# Altium PCB Rear Motors.PcbDoc
Units mm, origin at the board's own origin, x right, y up, seen from the top; angles counter-clockwise.
Board outline 82.5 x 85.5 mm, 2 copper layers (Top Layer, Bottom Layer); 45 components, 116 nets, 140 pads, 0 vias.
Unrouted connection lines stored in the file: 16.
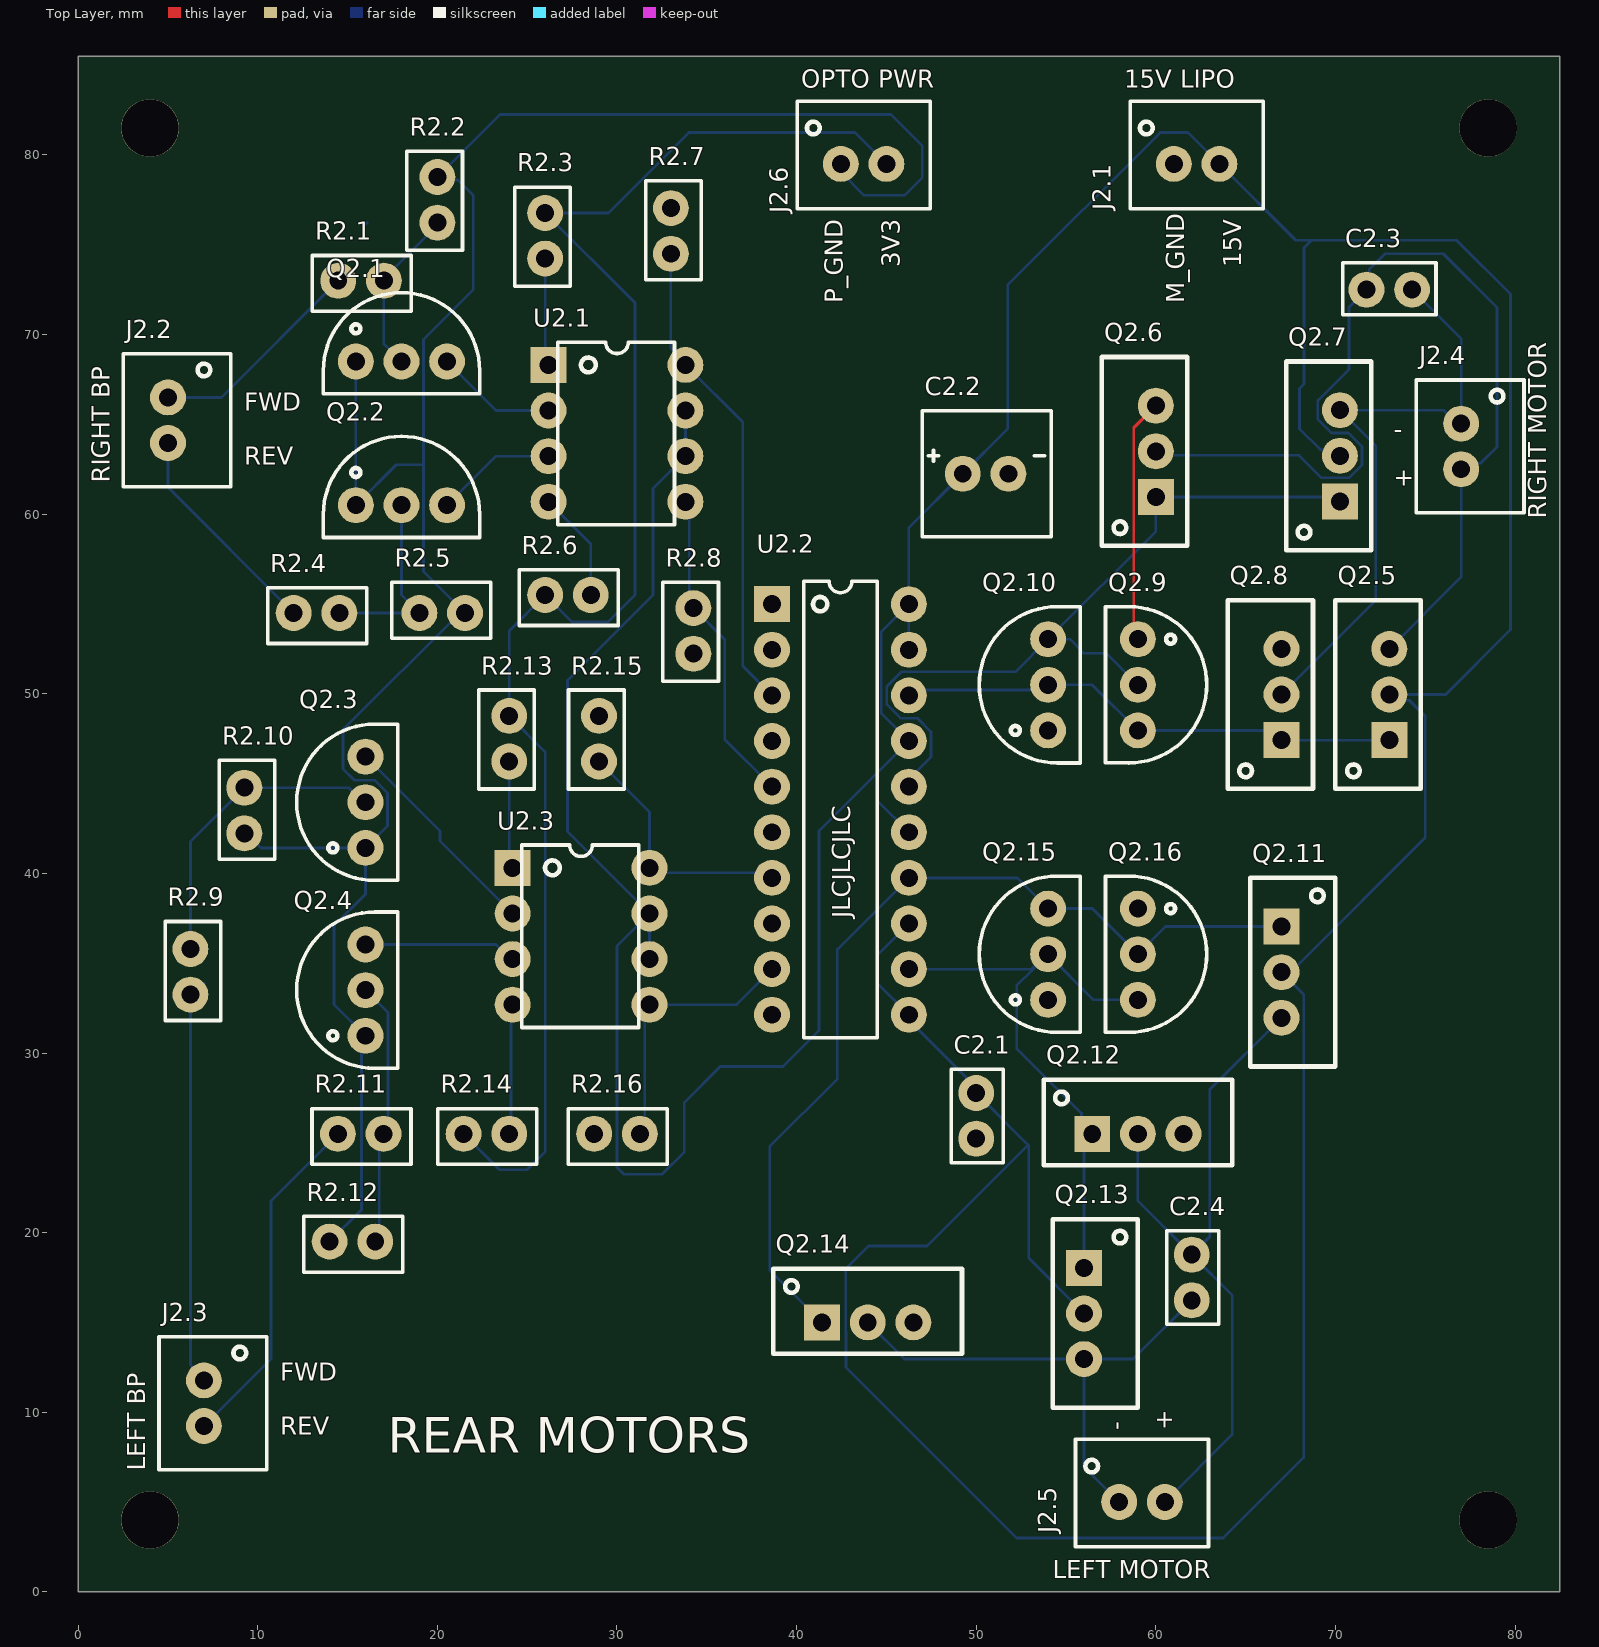
[diagram p0: Top Layer view]
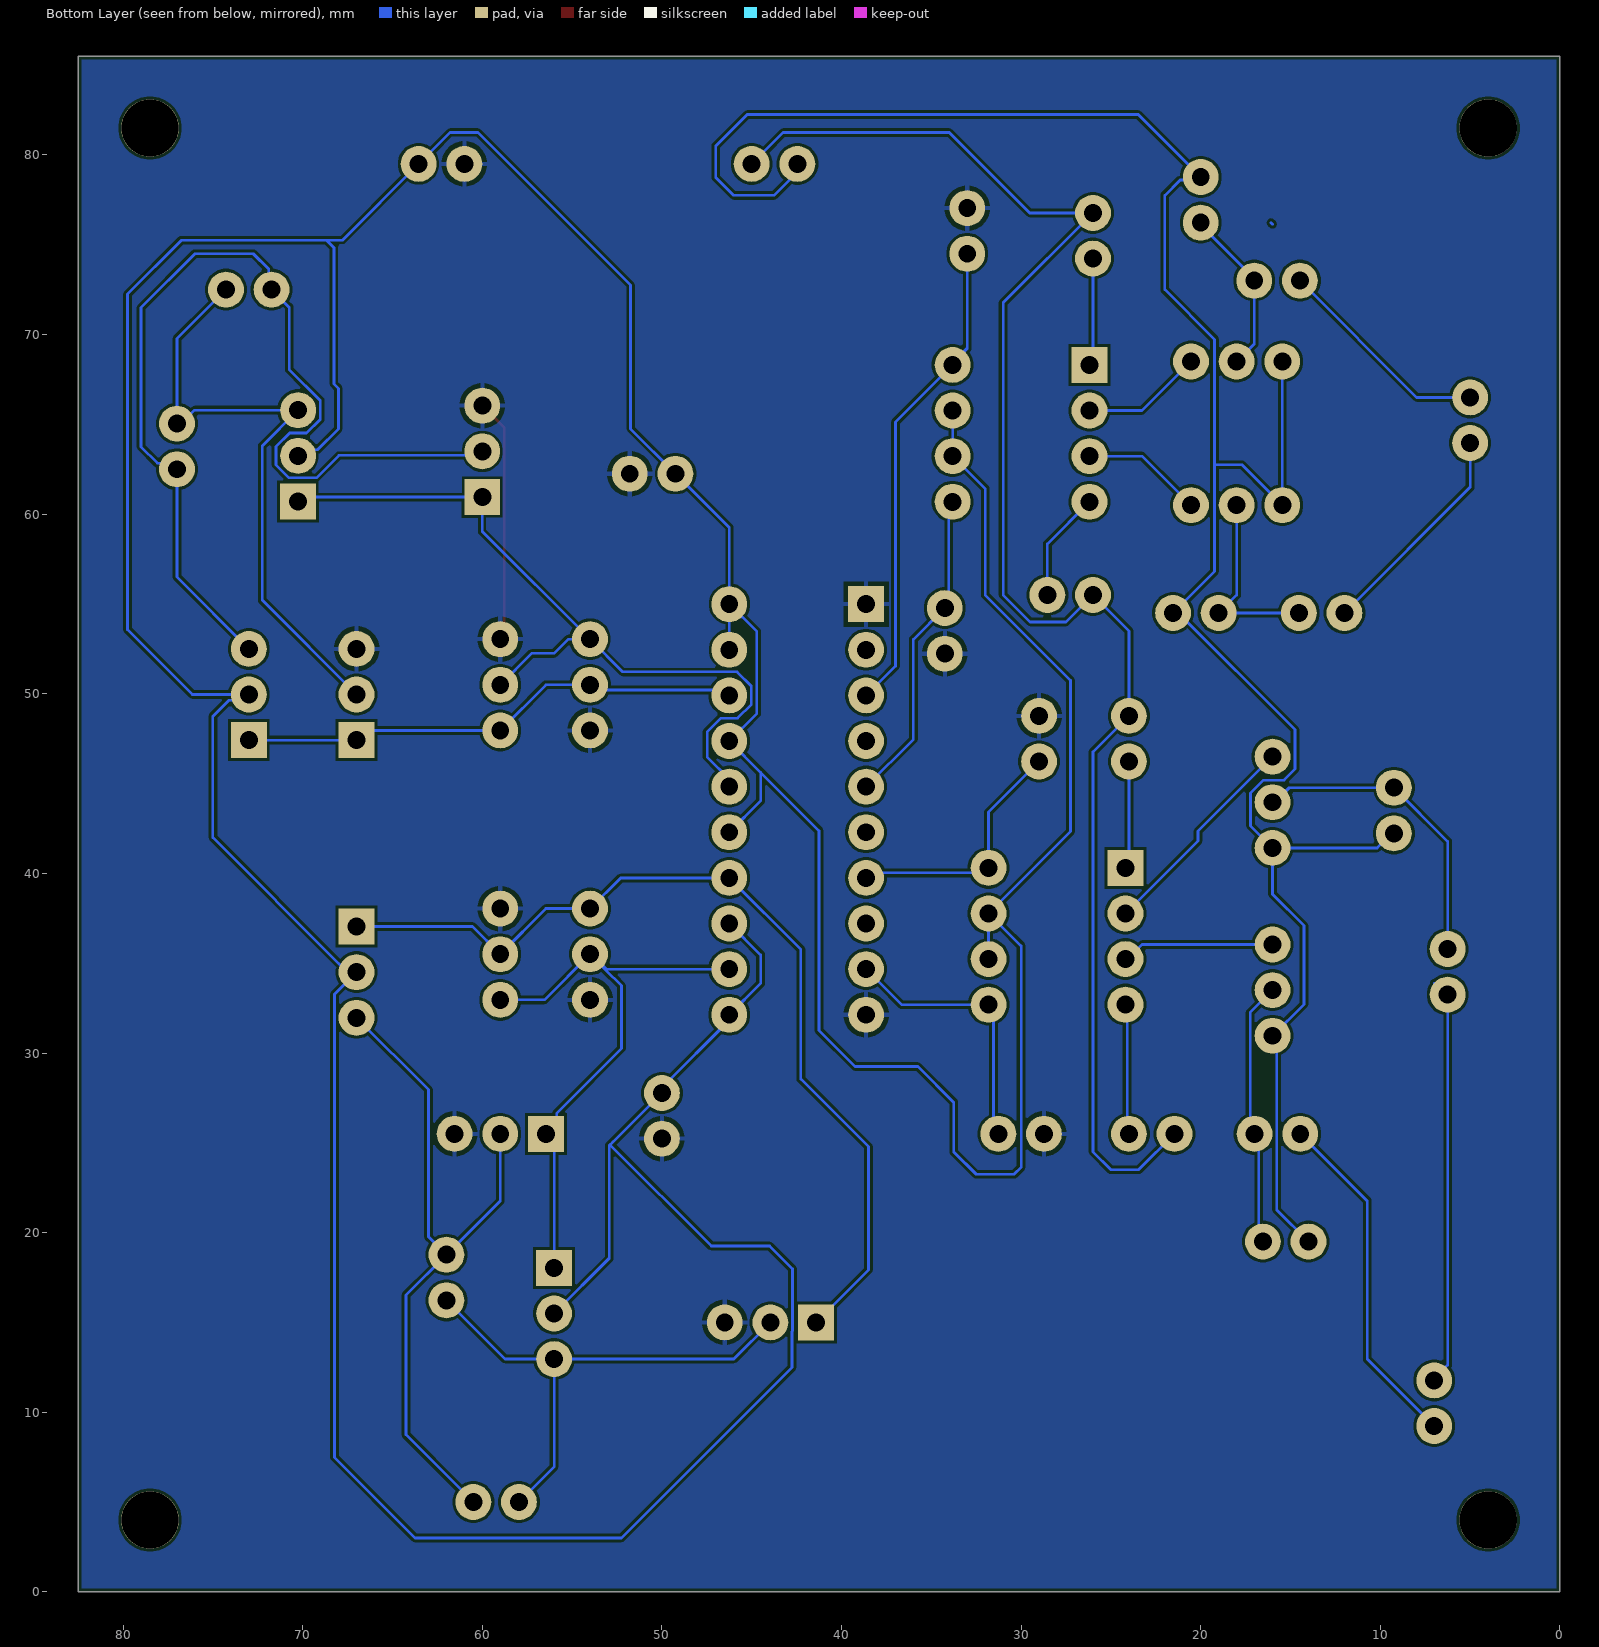
[diagram p1: Bottom Layer view, seen from below]
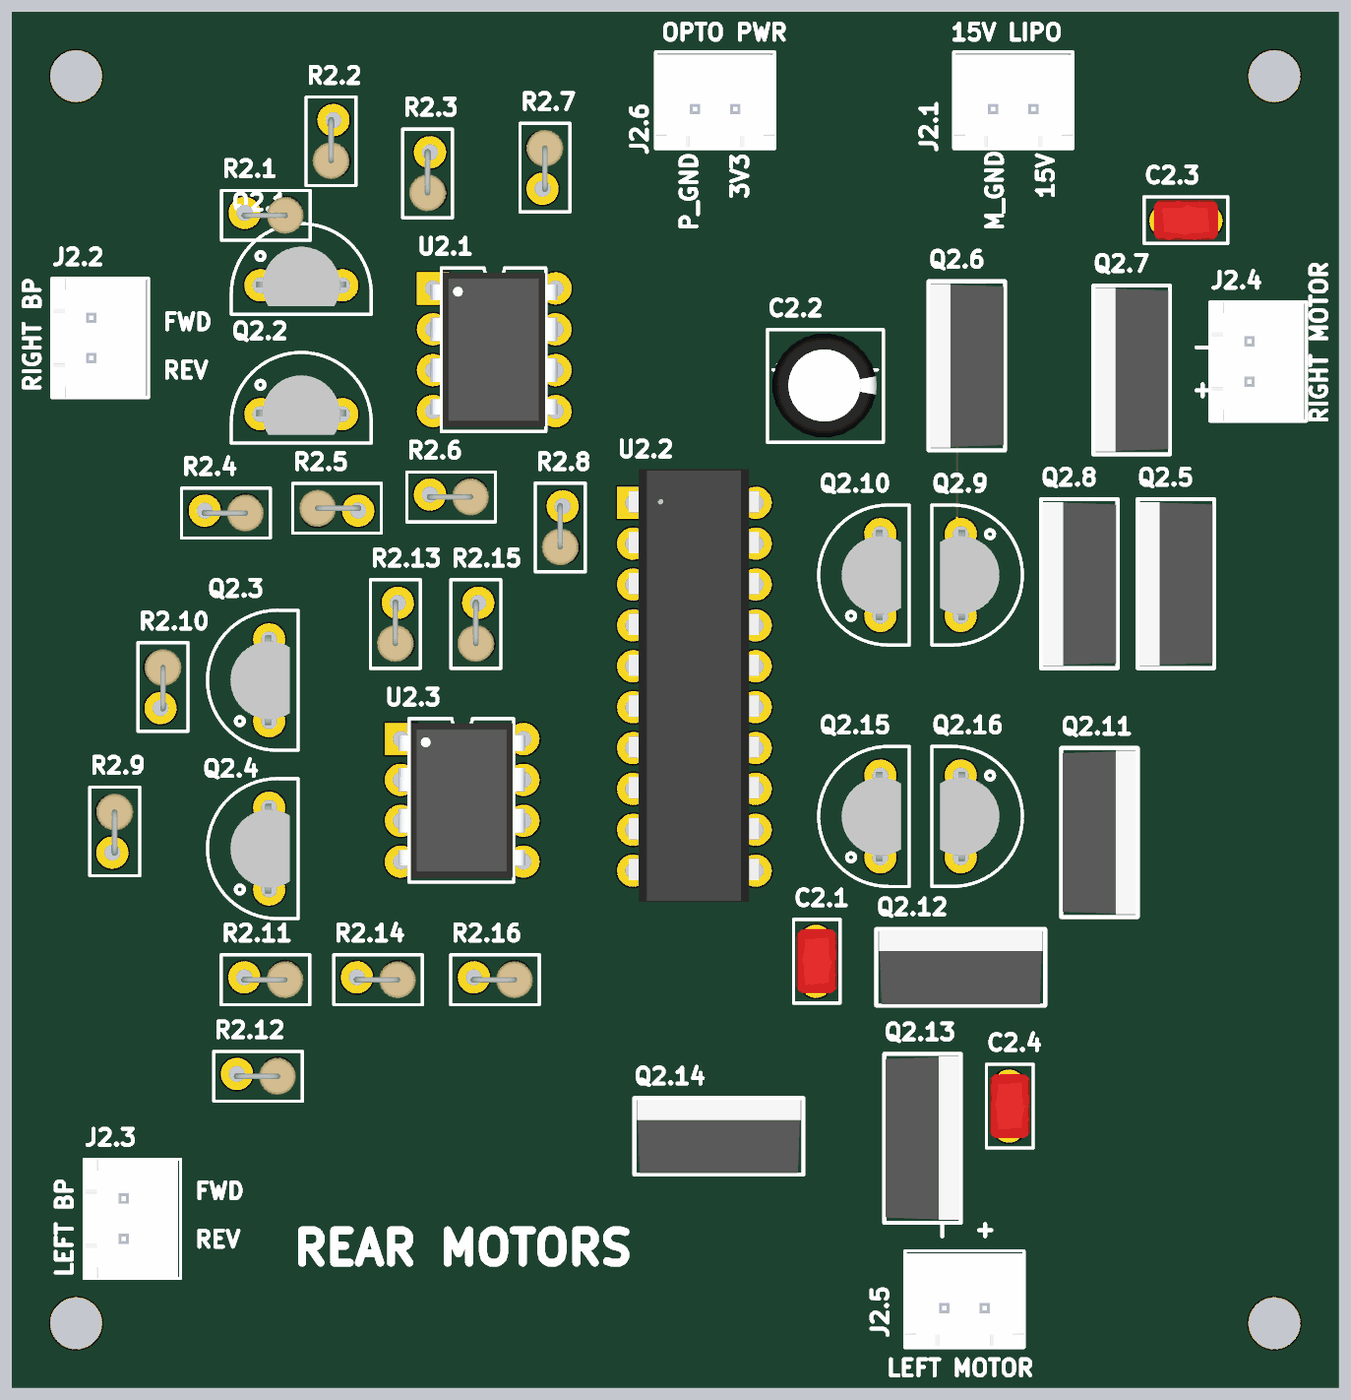
[diagram p2: 3D render of the assembled board from above, using the file's embedded part models]

## Layer stack, top to bottom
Top Solder: solder mask 0.0102, Solder Resist, Dk 3.5
Top Layer: signal copper 0.0356
Dielectric 1: dielectric 0.32, FR-4, Dk 4.8
Bottom Layer: signal copper 0.0356
Bottom Solder: solder mask 0.0102, Solder Resist, Dk 3.5

## Board outline
0,0 0,85.5 82.5,85.5 82.5,0

## Design rules (kind name [scope] priority, off if disabled: settings)
BoardOutlineClearance [All] p1: gap=0.2 ignorepadtopadclearanceinfootprint=FALSE
Clearance [All] p1: gap=0.152 ignorepadtopadclearanceinfootprint=FALSE
HoleSize [All] p1: absolutevalues=TRUE maxlimit=100 minlimit=0.4 maxpercent=80.000 minpercent=20.000
PolygonConnect [All] p1: connectstyle=Relief reliefconductorwidth=0.254 reliefentries=4 polygonreliefangle="90 Angle" airgapwidth=0.254
RoutingVias [All] p1: holewidth=0.4 width=0.8 viastyle="Through Hole" minholewidth=0.4 minwidth=0.6 maxholewidth=100 maxwidth=100
SilkToSilkClearance [All] p1: silktosilkclearance=0
SilkToSolderMaskClearance [IsPad] p1: minsilkscreentomaskgap=0 clearancetoexposedcopper=TRUE
SolderMaskExpansion [All] p1: expansion=0.102 istentingtop=FALSE
Width [All] p1: maxlimit=100 minlimit=0.152 preferedwidth=0.152
27 further rules are at their usual default settings.

## Components (designator, comment, footprint, x,y, rotation, side; value= is the part's Value field where it differs from the comment)
C2.1 "100p" "Non Polarized Cap" 50,26.5 r270 top
C2.2 "100u" "Polarized Cap" 50.52,62.25 r0 top
C2.3 "100n" "Non Polarized Cap" 73,72.5 r0 top
C2.4 "100n" "Non Polarized Cap" 62,17.5 r270 top
J2.1 "15V Lipo" "2pos JST" 62.27,79.5 r0 top
J2.2 "Right Motor BP" "2pos JST" 5,65.23 r270 top
J2.3 "Left Motor BP" "2pos JST" 7,10.5 r270 top
J2.4 "Left Motor Out" "2pos JST" 77,63.77 r270 top
J2.5 "Left Motor Out" "2pos JST" 59.23,5 r0 top
J2.6 "Optocoupler Power, Gnd" "2pos JST" 43.73,79.5 r0 top
Q2.1 "VN2222LL" VN2222LL 18,68.5 r0 top
Q2.2 "VN2222LL" VN2222LL 18,60.5 r0 top
Q2.3 "VN2222LL" VN2222LL 16,43.96 r90 top
Q2.4 "VN2222LL" VN2222LL 16,33.5 r90 top
Q2.5 "IRFZ44" TO220 73,49.96 r90 top
Q2.6 "IRFZ44" TO220 60,63.5 r90 top
Q2.7 "IRFZ44" TO220 70.25,63.25 r90 top
Q2.8 "IRFZ44" TO220 67,49.96 r90 top
Q2.9 "VN2222LL" VN2222LL 59,50.5 r270 top
Q2.10 "VN2222LL" VN2222LL 54,50.5 r90 top
Q2.11 "IRFZ44" TO220 67,34.5 r270 top
Q2.12 "IRFZ44" TO220 59,25.5 r0 top
Q2.13 "IRFZ44" TO220 56,15.5 r270 top
Q2.14 "IRFZ44" TO220 43.96,15 r0 top
Q2.15 "VN2222LL" VN2222LL 54,35.5 r90 top
Q2.16 "VN2222LL" VN2222LL 59,35.5 r270 top
R2.1 "1k" Res_Generic 15.75,73 r0 top
R2.2 "10k" Res_Generic 20,77.5 r270 top
R2.3 "330" Res_Generic 26,75.5 r270 top
R2.4 "1k" Res_Generic 13.27,54.5 r0 top
R2.5 "10k" Res_Generic 20.27,54.5 r180 top
R2.6 "330" Res_Generic 27.27,55.5 r0 top
R2.7 "1k" Res_Generic 33,75.77 r90 top
R2.8 "1k" Res_Generic 34.25,53.5 r270 top
R2.9 "1k" Res_Generic 6.25,34.52 r90 top
R2.10 "10k" Res_Generic 9.25,43.5 r90 top
R2.11 "1k" Res_Generic 15.73,25.5 r0 top
R2.12 "10k" Res_Generic 15.27,19.5 r0 top
R2.13 "330" Res_Generic 24,47.5 r270 top
R2.14 "330" Res_Generic 22.73,25.5 r0 top
R2.15 "1k" Res_Generic 29,47.5 r270 top
R2.16 "1k" Res_Generic 30,25.5 r0 top
U2.1 "MCT6" DIP8 30,64.5 r0 top
U2.2 "LT1161IN" DIP20 42.44,43.56 r0 top
U2.3 "MCT6" DIP8 28,36.5 r0 top

## Footprints (in the part's own frame and the unit in brackets; to place one, negate y for a bottom-side part, rotate by r counter-clockwise, add the part's x,y. Pads: shape width x height; smd on the part's side, far side on the other; paste and mask are expansions set on the pad)
"2pos JST" [mm]
  round 2 hole 1: 1(-1.27,0) 2(1.27,0)
  silkscreen extent -3.7,-2.5 3.7,3.5, body extent -3.7,-2.4 3.7,3.35, height 7.01
DIP8 [mm]
  rect 2x2 hole 1: 1(-3.81,3.81)
  round 2 hole 1: 2(-3.81,1.27) 3(-3.81,-1.27) 4(-3.81,-3.81) 5(3.81,-3.81) 6(3.81,-1.27) 7(3.81,1.27) 8(3.81,3.81)
  silkscreen extent -3.3,-5.08 3.2,5.08, body extent -3.96,-4.79 3.91,4.79, height 5.33
DIP20 [mm]
  rect 2x2 hole 1: 1(-3.81,11.43)
  round 2 hole 1: 2(-3.81,8.89) 3(-3.81,6.35) 4(-3.81,3.81) 5(-3.81,1.27) 6(-3.81,-1.27) 7(-3.81,-3.81) 8(-3.81,-6.35) 9(-3.81,-8.89) 10(-3.81,-11.43) 11(3.81,-11.43) 12(3.81,-8.89) 13(3.81,-6.35) 14(3.81,-3.81) 15(3.81,-1.27) 16(3.81,1.27) 17(3.81,3.81) 18(3.81,6.35) 19(3.81,8.89) 20(3.81,11.43)
  silkscreen extent -2.04,-12.7 2.04,12.7, body extent -4.09,-13.39 4.04,13.53, height 3.81
"Non Polarized Cap" [mm] "Cap Generic THT"
  round 2 hole 1: 1(-1.27,0) 2(1.27,0)
  silkscreen extent -2.6,-1.4 2.6,1.5, body extent -2,-1.2 2,1.3, height 6
"Polarized Cap" [mm]
  round 2 hole 1: 1(-1.27,0) 2(1.27,0)
  silkscreen extent -3.53,-3.5 3.66,3.5, body extent -3.25,-3.22 3.25,3.28, height 11.37
Res_Generic [mm] "Cap Generic THT Footprint"
  round 2 hole 1: 1(-1.27,0) 2(1.27,0)
  silkscreen extent -2.71,-1.7 2.8,1.4, body extent -1.47,-1.3 2.4,1, height 8.18
TO220 [mm]
  rect 2x2 hole 1: 1(-2.54,0)
  round 2 hole 1: 2(0,0) 3(2.54,0)
  silkscreen extent -5.25,-1.75 5.25,3, body extent -5.08,-1.66 5.08,2.91, height 19.6
VN2222LL [mm]
  round 2 hole 1: 1(-2.54,0) 2(0,0) 3(2.54,0)
  silkscreen extent -4.35,-1.8 4.35,3.83, body extent -2.78,-1.28 2.78,2.4, height 7.82

## Part data
C2.1 C2.3 C2.4: library part Cap_Generic
C2.2: library part "Polarized Cap"
J2.1 J2.2 J2.3 J2.4 J2.5 J2.6: library part "2pos Conn", "2pos Conn JST"
Q2.1 Q2.2 Q2.3 Q2.4 Q2.9 Q2.10 Q2.15 Q2.16: library part "VN2222LL NMOS", "VN2222LL N-Channel 60 V 150mA 400mW Through Hole TO-92 (TO-226)", Supplier Part Number 1=689-VN2222LL-G, Supplier 1=Mouser
Q2.5 Q2.6 Q2.7 Q2.8 Q2.11 Q2.12 Q2.13 Q2.14: library part "IRFZ44 NMOS", "IRFZ44EPBF N-Channel 60 V 48A 110W Through Hole TO-220AB", Supplier Part Number 1=IRFZ44ZLPBF-ND, Supplier 1=Digi-Key
R2.1 R2.2 R2.3 R2.4 R2.5 R2.6 R2.7 R2.8 R2.9 R2.10 R2.11 R2.12 R2.13 R2.14 R2.15 R2.16: library part Res_Generic
U2.1 U2.3: library part "MCT6 Optocoupler", "Optoisolator 5.3KV 2CH TRANS 8-DIP", Supplier Part Number 1=512-MCT6, Supplier 1=Mouser
U2.2: library part "LT1161IN Gate Driver", "LT1161IN High-Side Gate Driver IC Non-Inverting 20-PDIP", Supplier Part Number 1=LT1161IN#PBF-ND, Supplier 1=Digi-Key

## Free pads (board coordinates)
  round 3.2 hole 3.2: ""(4,4) ""(4,81.5) ""(78.5,4) ""(78.5,81.5)

## Nets (pads, with @x,y where several pads share a name; then routed paths per layer and width w, separated by ;. In a path a pad name is that pad's centre, name@x,y a point inside that pad or via, vN(x,y) a via of type N, cw(c..) or ccw(c..) an arc to the next point about the centre after c; other vN are vias at no path point)
3.3V_P: J2.6.2 R2.3.1 R2.6.1 R2.13.1 R2.14.1 | length 89.6
  Bottom Layer w0.152: R2.14.1 23.46,23.5 25,23.5 26,24.5 26,46.77 R2.13.1 24,53.5 R2.6.1 27.5,54 29.5,54 31,55.5 31,71.77 R2.3.1 29.52,76.77 34,81.25 43.25,81.25 J2.6.2
5V_ARM: 
5V_P: 
5V_SERVO: 
8V: 
15V: C2.1.1 C2.2.1 J2.1.2 Q2.5.2 Q2.7.2 Q2.11.2 Q2.13.2 U2.1.6 U2.1.7 U2.2.11 U2.2.13 U2.2.15 U2.2.17 U2.2.19 U2.2.20 U2.3.6 U2.3.7 | length 320.1
  Bottom Layer w0.152: U2.3.6 U2.3.7 ; U2.1.7 U2.1.6 32,61.42 32,55.5 27.25,50.75 27.25,42.33 U2.3.7 ; U2.2.13 44.5,35.46 44.5,33.88 U2.2.11 46.25,31.825 50,28.075 C2.1.1 52.717,25.053 52.929,24.841 52.929,18.571 Q2.13.2 ; U2.2.15 44.5,44.04 44.5,45.62 ; U2.2.19 U2.2.20 ; 52.885,24.885 47.25,19.25 44,19.25 42.731,17.981 42.731,14.519 42.75,14.5 42.75,12.5 52.25,3 63.75,3 68.229,7.479 68.229,33.271 Q2.11.2 67.5,34.5 67.966,34.966 75,42 75,48.75 74.111,49.639 73.853,49.639 73.79,49.702 Q2.5.2@73.79,49.96 ; Q2.7.2 69.909,63.591 69.159,63.591 68,64.75 68,67 68.25,67.25 68.25,74.835 68.665,75.25 ; Q2.5.2 Q2.5.2@73.79,49.96 ; U2.3.7 30,35.96 30,23.636 30.386,23.25 32.5,23.25 33.75,24.5 33.75,27.25 35.75,29.25 39.25,29.25 41.25,31.25 41.25,42.37 44.5,45.62 ; 44.5,45.62 U2.2.17 44.717,48.903 44.717,53.457 U2.2.20 ; U2.2.20 46.25,59.25 C2.2.1 51.75,64.75 51.75,72.75 60.25,81.25 61.79,81.25 J2.1.2 67.79,75.25 68.665,75.25 ; 68.665,75.25 76.75,75.25 79.75,72.25 79.75,53.569 76.141,49.96 Q2.5.2@73.79,49.96
ARM_SERV_BP_OUT: 
ARM_SERV_PWM: 
BOX_SERV_BP_OUT: 
BOX_SERV_PWM: 
BRIDGE_SERV_BP_OUT: 
BRIDGE_SERV_PWM: 
CLAW_SERV_BP_OUT: 
CLAW_SERV_PWM: 
DCLK: 
DIO: 
ECHO_F_M: 
ECHO_S_L: 
ECHO_S_R: 
ECHO_SPARE: 
ENCODER_L_I: 
ENCODER_L_Q: 
ENCODER_R_I: 
ENCODER_R_Q: 
IR_LEFT_TRANS: 
IR_RIGHT_TRANS: 
IR_SNS_LEFT: 
IR_SNS_RIGHT: 
LEFT+: C2.4.1 J2.5.2 Q2.11.3 Q2.12.2 | length 39.8
  Bottom Layer w0.152: Q2.12.2 59,21.77 C2.4.1 ; J2.5.2@60.268,4.768 J2.5.2 64.25,8.75 64.25,16.52 C2.4.1 ; Q2.11.3 63,27.96 63,19.77 C2.4.1
LEFT-: C2.4.2 J2.5.1 Q2.13.3 Q2.14.2 | length 29.7
  Bottom Layer w0.152: Q2.14.2 46,12.96 Q2.13.3 ; J2.5.1@57.759,4.529 J2.5.1@58.23,5 ; J2.5.1 56,6.96 Q2.13.3 ; C2.4.2 58.73,12.96 Q2.13.3
LEFT_FWD: Q2.11.1 Q2.14.1 Q2.15.3 Q2.16.2 U2.2.14 | length 52.3
  Bottom Layer w0.152: Q2.14.1 38.5,17.92 38.5,24.79 42.265,28.555 42.265,35.765 U2.2.14 52.29,39.75 Q2.15.3 56.46,38.04 Q2.16.2 60.54,37.04 Q2.11.1
LEFT_FWD_BP_OUT: J2.3.1 R2.9.1 | length 22.4
  Bottom Layer w0.152: R2.9.1 6.25,12.631 7,11.881 J2.3.1 ; R2.9.1@7,33.25 R2.9.1@7,33.877
LEFT_REV: Q2.12.1 Q2.13.1 Q2.15.2 Q2.16.3 U2.2.12 | length 34.3
  Bottom Layer w0.152: U2.2.12 53.093,34.67 53.923,35.5 Q2.15.2 ; Q2.13.1 56,25.04 Q2.12.1 55.861,26.099 55.861,26.639 52.25,30.25 52.25,33.75 53.131,34.631 53.961,35.461 Q2.15.2 ; Q2.16.3 56.54,32.96 Q2.15.2
LEFT_REV_BP_OUT: J2.3.2 R2.11.1 | length 19.4
  Bottom Layer w0.152: J2.3.2 10.73,12.96 10.73,21.77 R2.11.1
M_GND: C2.1.2 C2.2.2 J2.1.1 Q2.6.3 Q2.8.3 Q2.9.1 Q2.10.1 Q2.12.3 Q2.14.3 Q2.15.1 Q2.16.1 R2.7.2 R2.8.2 R2.15.1 R2.16.1 U2.2.1 U2.2.10 | length 13.6
  Top Layer w0.152: Q2.9.1 58.771,53.269 58.771,64.811 Q2.6.3
MAGNET_SNS: 
NetC1.8_2: 
NetC5.1_1: 
NetC5.1_2: 
NetC5.2_1: 
NetC5.2_2: 
NetQ2.1_2: Q2.1.2 R2.1.2 R2.2.2 | length 9.4
  Bottom Layer w0.152: Q2.1.2 17.02,69.48 R2.1.2 17.02,73.125 20,76.105 R2.2.2
NetQ2.1_3: Q2.1.3 U2.1.2 | length 6.8
  Bottom Layer w0.152: Q2.1.3 23.27,65.77 U2.1.2
NetQ2.2_2: Q2.2.2 R2.4.2 R2.5.2 | length 10.9
  Bottom Layer w0.152: R2.4.2 R2.5.2 18,55.5 Q2.2.2
NetQ2.2_3: Q2.2.3 U2.1.3 | length 6.8
  Bottom Layer w0.152: Q2.2.3 23.27,63.23 U2.1.3
NetQ2.3_2: Q2.3.2 R2.9.2 R2.10.2 | length 17.3
  Bottom Layer w0.152: R2.9.2 6.25,41.77 R2.10.2 15.073,44.77 15.883,43.96 Q2.3.2
NetQ2.3_3: Q2.3.3 U2.3.2 | length 12.1
  Bottom Layer w0.152: Q2.3.3 20.149,42.351 20.149,41.811 U2.3.2
NetQ2.4_2: Q2.4.2 R2.11.2 R2.12.2 | length 14.8
  Bottom Layer w0.152: Q2.4.2 17.25,32.25 17.25,25.75 16.77,25.27 16.77,19.73 R2.12.2
NetQ2.4_3: Q2.4.3 U2.3.3 | length 8.5
  Bottom Layer w0.152: Q2.4.3 23.263,36.04 24.073,35.23 U2.3.3
NetQ3.1_2: 
NetQ3.1_3: 
NetQ3.2_2: 
NetQ3.2_3: 
NetQ3.3_2: 
NetQ3.3_3: 
NetQ3.4_2: 
NetQ3.4_3: 
NetQ3.5_1: 
NetQ3.6_1: 
NetQ3.7_1: 
NetQ3.8_1: 
NetR2.3_2: R2.3.2 U2.1.1 | length 6
  Bottom Layer w0.152: R2.3.2 26,68.5 U2.1.1
NetR2.6_2: R2.6.2 U2.1.4 | length 6.2
  Bottom Layer w0.152: U2.1.4 28.54,58.34 R2.6.2
NetR2.7_1: R2.7.1 U2.1.8 U2.2.3 | length 26.9
  Bottom Layer w0.152: R2.7.1 33,69.237 33.81,68.427 U2.1.8 37,65.12 37,51.54 U2.2.3
NetR2.8_1: R2.8.1 U2.1.5 U2.2.5 | length 17.9
  Bottom Layer w0.152: U2.1.5 34.03,60.47 34.03,54.99 R2.8.1 36,53.02 36,47.46 U2.2.5
NetR2.13_2: R2.13.2 U2.3.1 | length 6
  Bottom Layer w0.152: R2.13.2 24,40.5 U2.3.1
NetR2.14_2: R2.14.2 U2.3.4 | length 7.3
  Bottom Layer w0.152: R2.14.2 24.095,25.595 24.095,32.595 U2.3.4
NetR2.15_2: R2.15.2 U2.2.7 U2.3.8 | length 14.1
  Bottom Layer w0.152: R2.15.2 31.81,43.42 U2.3.8 32.09,40.03 38.35,40.03 U2.2.7
NetR2.16_2: R2.16.2 U2.2.9 U2.3.5 | length 15.1
  Bottom Layer w0.152: R2.16.2 31.54,25.77 31.54,32.42 U2.3.5 36.65,32.69 U2.2.9
NetR3.3_2: 
NetR3.4_1: 
NetR3.5_1: 
NetR3.6_2: 
NetR3.11_2: 
NetR3.12_2: 
NetR3.13_1: 
NetR3.14_2: 
NetR4.11_2: 
NetR4.13_2: 
NetR4.15_2: 
NetR4.17_2: 
NetR4.19_2: 
NetR5.2_1: 
NetR5.4_2: 
NetR5.7_1: 
NetR5.9_2: 
P_GND: J2.6.1 Q2.1.1 Q2.2.1 Q2.3.1 Q2.4.1 R2.2.1 R2.5.1 R2.10.1 R2.12.1 | length 126.9
  Bottom Layer w0.152: R2.10.1 9.368,42.23 10.178,41.42 Q2.3.1 ; R2.12.1 15.771,21.271 15.771,30.731 Q2.4.1 14.25,32.71 14.25,37.09 16,38.84 Q2.3.1 ; Q2.1.1 Q2.2.1 17.71,62.75 19.229,62.75 ; J2.6.1 42.46,79.04 43.75,77.75 46,77.75 47,78.75 47,80.5 45.25,82.25 23.48,82.25 R2.2.1 20.159,78.611 21.139,78.611 22,77.75 22,72.5 19.229,69.729 19.229,62.75 ; Q2.3.1 17.229,42.649 17.229,44.469 16.509,45.189 15.37,45.189 14.75,45.809 14.75,48 21.25,54.5 R2.5.1 19.229,56.811 19.229,62.75
REF_F_L_COL: 
REF_F_L_LED: 
REF_F_L_SNS: 
REF_F_R_COL: 
REF_F_R_LED: 
REF_F_R_SNS: 
REF_R_COL: 
REF_R_LED: 
REF_R_SNS: 
REF_S_L_COL: 
REF_S_L_LED: 
REF_S_L_SNS: 
REF_S_R_COL: 
REF_S_R_LED: 
REF_S_R_SNS: 
RIGHT+: C2.3.1 J2.4.2 Q2.5.3 Q2.6.2 | length 56.9
  Bottom Layer w0.152: Q2.6.2@59.5,63.5 Q2.6.2 ; Q2.6.2@60.224,63.276 67.974,63.276 69.229,62.021 70.759,62.021 71.479,62.741 71.479,63.759 70.718,64.52 69.783,64.52 69.021,65.281 69.021,66.324 70.75,68.052 70.75,71.52 71.889,72.659 71.889,73.639 72.75,74.5 76,74.5 79,71.5 79,63.75 78.091,62.841 77.341,62.841 J2.4.2 77,56.5 Q2.5.3
RIGHT-: C2.3.2 J2.4.1 Q2.7.3 Q2.8.2 | length 34.5
  Bottom Layer w0.152: Q2.8.2 72.25,55.21 72.25,63.79 Q2.7.3 76.013,65.79 76.763,65.04 J2.4.1 77,69.77 C2.3.2
RIGHT_FWD: Q2.5.1 Q2.8.1 Q2.9.3 Q2.10.2 U2.2.18 | length 28.3
  Bottom Layer w0.152: U2.2.18 46.545,50.205 53.705,50.205 Q2.10.2 56.46,50.5 Q2.9.3 66.46,47.96 Q2.8.1 Q2.5.1
RIGHT_FWD_BP_OUT: J2.2.1 R2.1.1 | length 12.2
  Bottom Layer w0.152: J2.2.1 7.98,66.5 R2.1.1
RIGHT_REV: Q2.6.1 Q2.7.1 Q2.9.2 Q2.10.3 U2.2.16 | length 44.5
  Bottom Layer w0.152: U2.2.16 46.25,45.25 47.479,46.479 47.479,47.879 46.718,48.64 45.783,48.64 45.021,49.401 45.021,50.419 45.824,51.221 52.181,51.221 Q2.10.3 ; Q2.9.2 57.25,52.25 56,52.25 55.21,53.04 Q2.10.3 ; Q2.7.1 70,60.96 Q2.6.1 60,59.04 Q2.10.3
RIGHT_REV_BP_OUT: J2.2.2 R2.4.1 | length 12.4
  Bottom Layer w0.152: J2.2.2 5,61.5 R2.4.1
SPARE_1: 
SW_CLAW+: 
SW_CLAW_SNS: 
SW_FRONT+: 
SW_FRONT_SNS: 
SW_REAR+: 
SW_REAR_SNS: 
TRIG_COM: 
pads on no net: U2.2.2 U2.2.4 U2.2.6 U2.2.8
copper on no net: | length 0.1
  Bottom Layer w0.152: 16,76.141 16.045,76.185 16.089,76.23

## Polygon pours and split planes (outlines as drawn)
M_GND on Bottom Layer "GND " (solid, remove dead copper, pour order 0): 0,85.5 82.5,85.5 82.5,0 0,0

## Silkscreen, mask and mechanical layers (free items; w line width, h text height)
Top Overlay:
  text "OPTO PWR" at 40.254,83.754 h1
  text "15V LIPO" at 58.254,83.754 h1
  text "3V3" at 45.746,73.754 h1 r90
  text "15V" at 64.746,73.754 h1 r90
  text "P_GND" at 42.579,71.754 h1 r90
  text "M_GND" at 61.579,71.754 h1 r90
  text "FWD" at 9.254,65.754 h1
  text "-" at 73.254,64.254 h1
  text "REV" at 9.254,62.754 h1
  text "RIGHT BP" at 1.746,61.754 h1 r90
  text "+" at 73.254,61.587 h1
  text "RIGHT MOTOR" at 81.746,59.754 h1 r90
  text "JLCJLCJLC" at 42.996,37.504 h1 r90
  text "FWD" at 11.254,11.754 h1
  text "-" at 58.246,9.004 h1 r90
  text "+" at 60.913,9.004 h1 r90
  text "REV" at 11.254,8.754 h1
  text "REAR MOTORS" at 17.25,7.75 h2
  text "LEFT BP" at 3.746,6.754 h1 r90
  text "LEFT MOTOR" at 54.254,0.754 h1
Mechanical 1:
  the board outline again, w0.2